# Altium PCB PCB181216ver1.PcbDoc
Units mm, origin at the board's own origin, x right, y up, seen from the top; angles counter-clockwise.
Board outline 92.5 x 85 mm, 2 copper layers (Top Layer, Bottom Layer), stack 1.671 mm thick; 35 components, 33 nets, 131 pads, 40 vias.
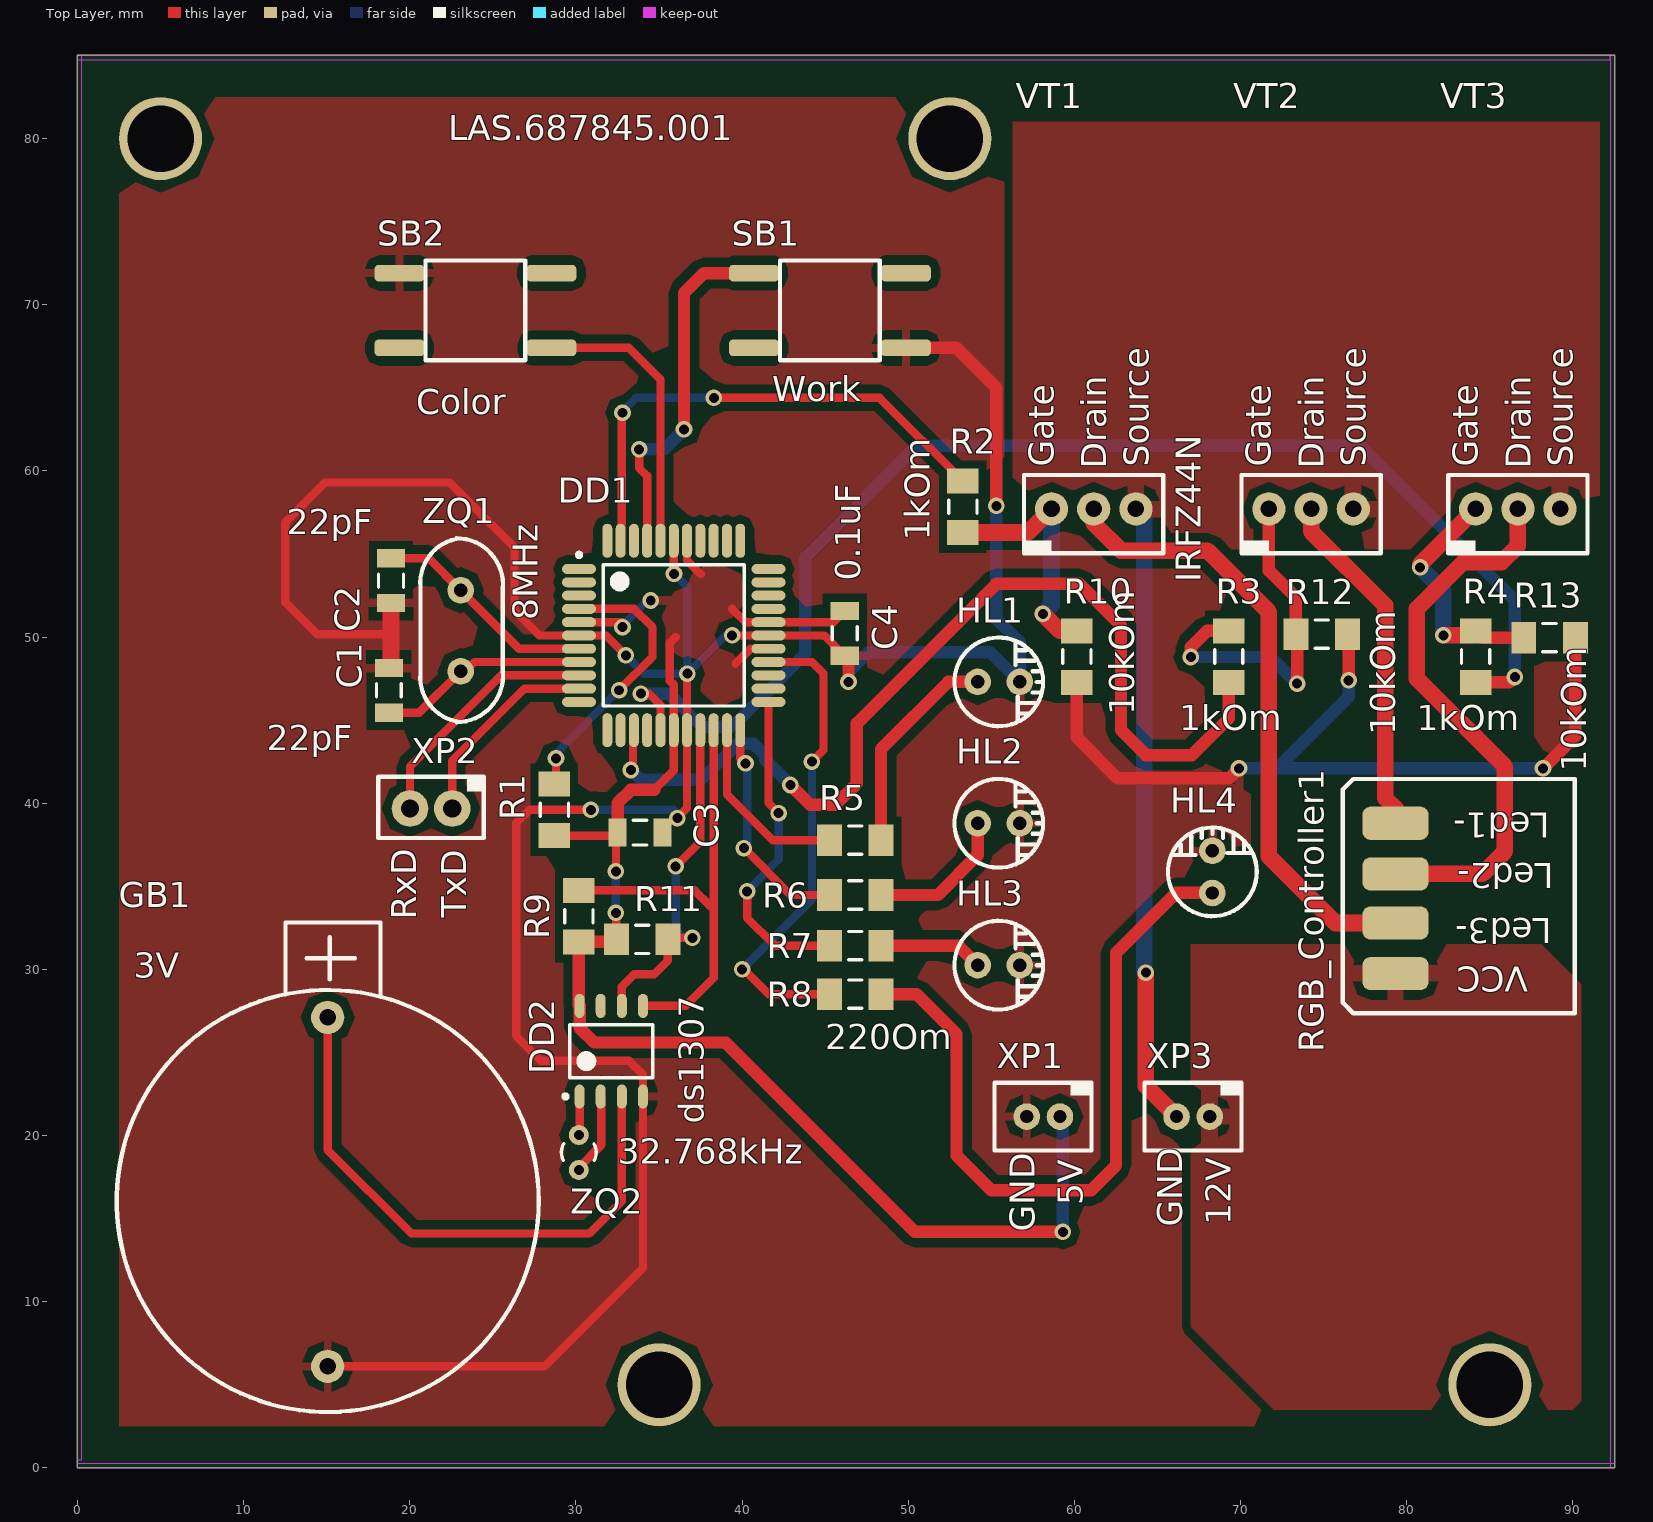
[diagram p0: Top Layer view]
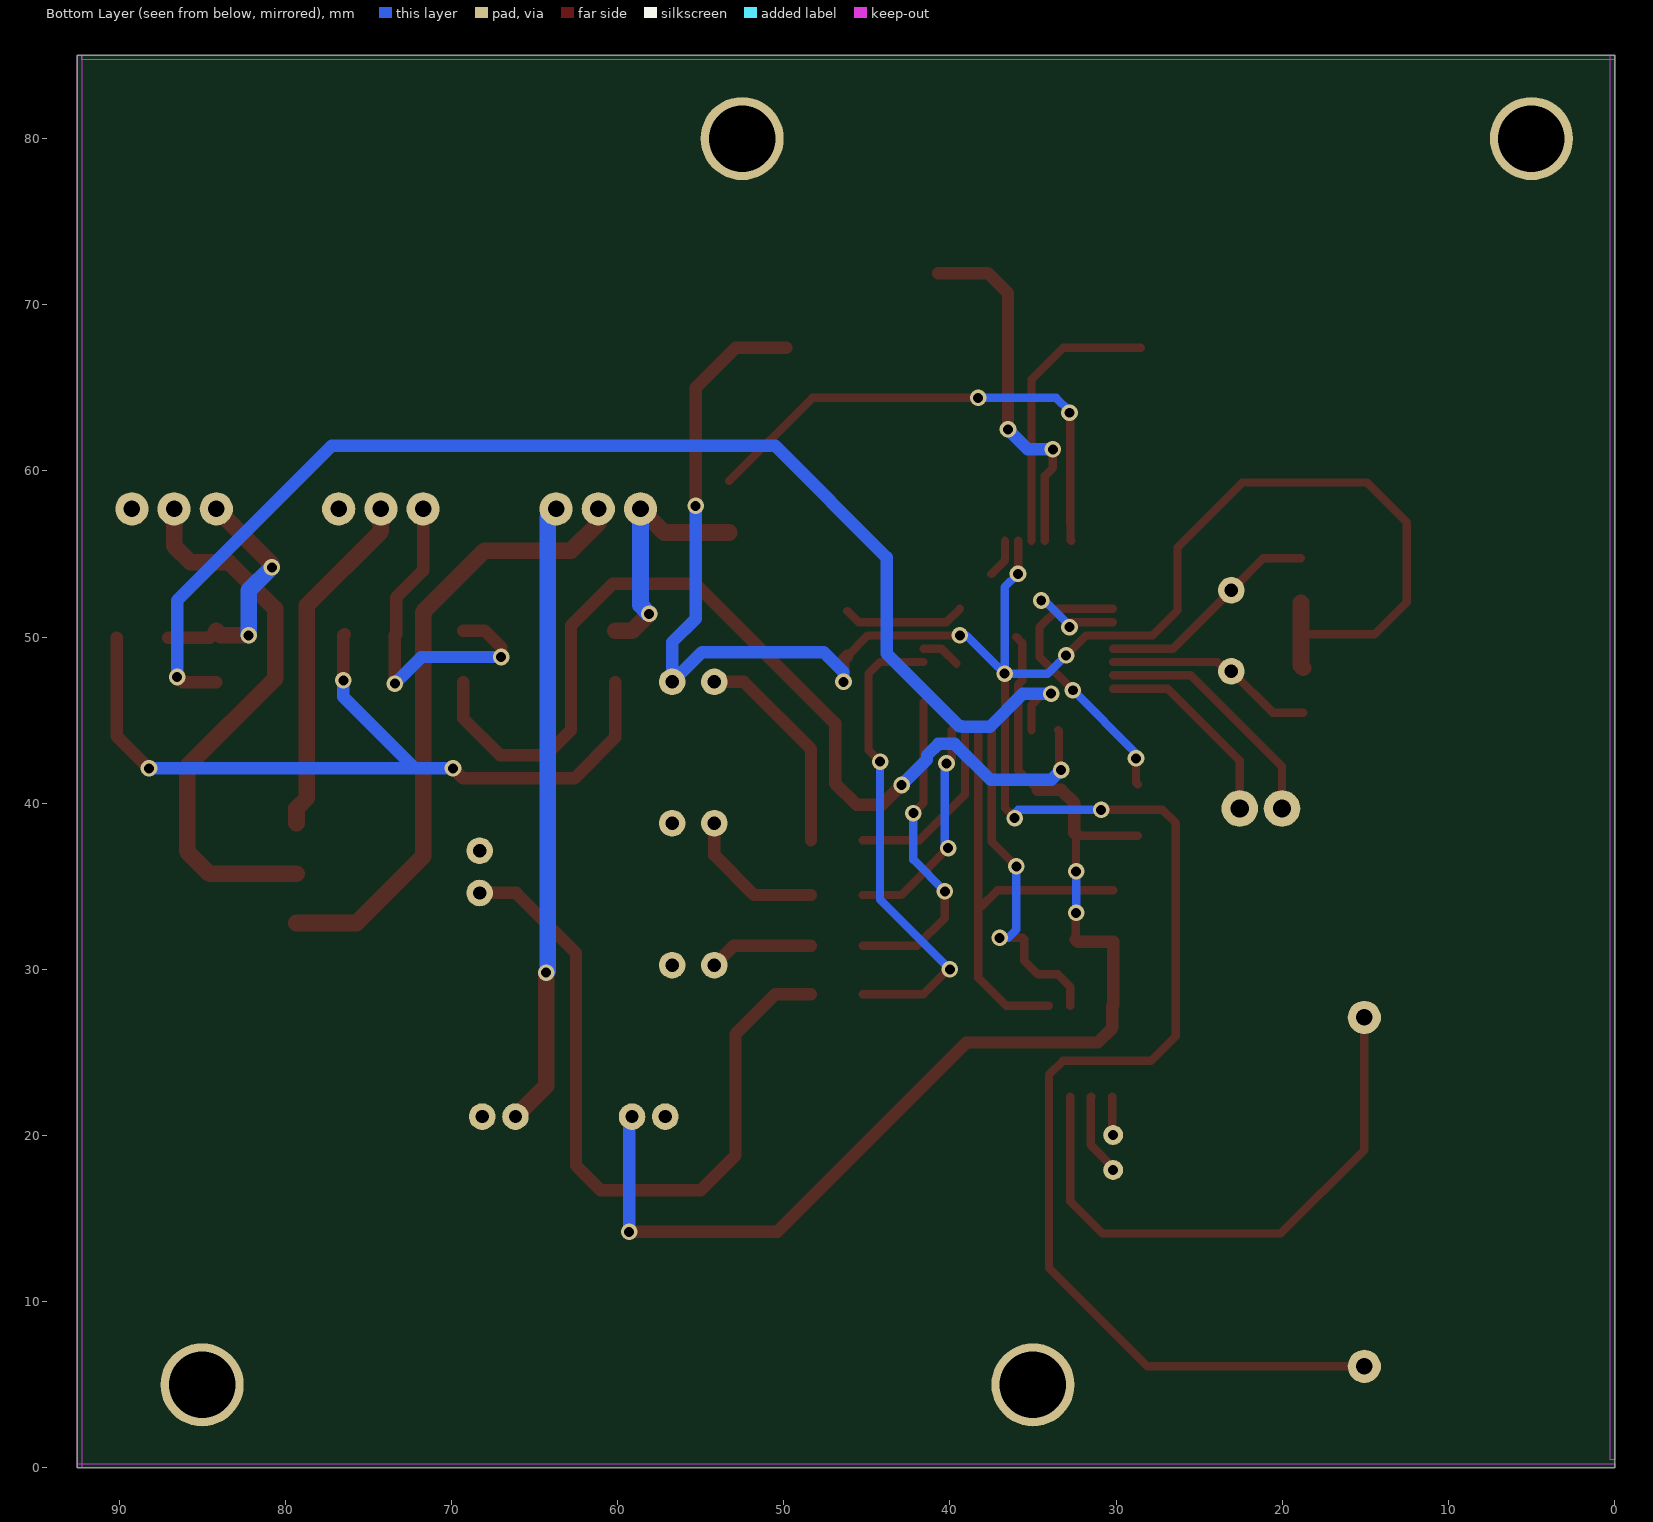
[diagram p1: Bottom Layer view, seen from below]
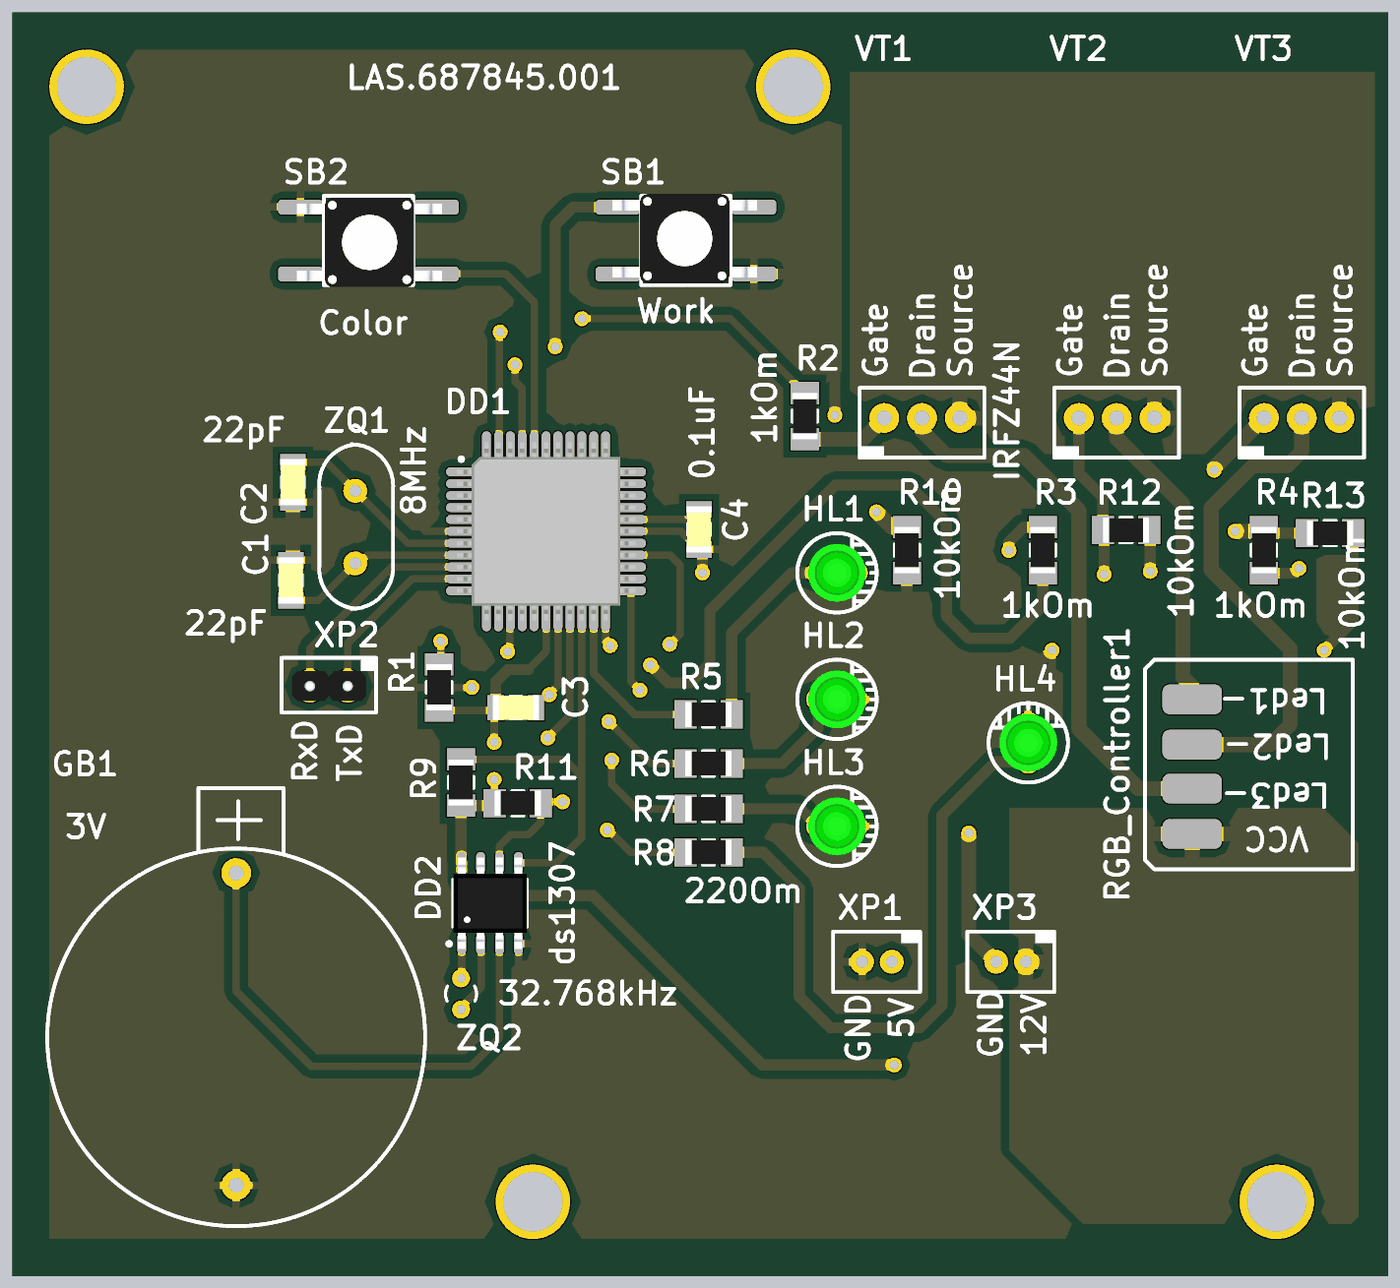
[diagram p2: 3D render of the assembled board from above, using the file's embedded part models]

## Layer stack, top to bottom
Top Solder: solder mask 0.0102, Solder Resist, Dk 3.5
Top Layer: signal copper 0.0356
Dielectric 1: dielectric 1.6, FR-4, Dk 4.8
Bottom Layer: signal copper 0.0356
Bottom Solder: solder mask 0.0102, Solder Resist, Dk 3.5

## Board outline
0,0 0,85 92.5,85 92.5,0

## Design rules (kind name [scope] priority, off if disabled: settings)
Clearance [All] p1: gap=0.5 except(0.2: Arc-SMDPad Track-SMDPad SMDPad-SMDPad; 0.254: Arc-Text Track-Text SMDPad-Text THPad-Text Via-Text Fill-Text Poly-Text Region-Text Text-Text; 0.3: Arc-Via Arc-Fill Track-Track Track-Via Track-Fill SMDPad-THPad SMDPad-Via SMDPad-Fill THPad-THPad THPad-Via THPad-Fill Via-Via Via-Fill Fill-Fill)
PlaneClearance DIG [InNetClass('digital')] p1: clearance=0.3
PlaneClearance OTT [InNetClass('other')] p2: clearance=0.5
PlaneClearance po12V [InNetClass('Power12V')] p3: clearance=1
PlaneClearance po5v [InNetClass('Power5V')] p4: clearance=0.5
PlaneConnect [InNetClass('digital')] p1: planeconnectstyle=Relief reliefexpansion=0.5 reliefentries=4 reliefconductorwidth=0.5 reliefairgap=0.5
PlaneConnect OT [InNetClass('other')] p2: planeconnectstyle=Relief reliefexpansion=0.5 reliefentries=4 reliefconductorwidth=0.5 reliefairgap=0.5
PlaneConnect 12Vol [InNetClass('Power12V')] p3: planeconnectstyle=Relief reliefexpansion=1 reliefentries=4 reliefconductorwidth=1 reliefairgap=0.75
PlaneConnect 5vol [All] p4: planeconnectstyle=Relief reliefexpansion=0.5 reliefentries=4 reliefconductorwidth=0.75 reliefairgap=0.5
PolygonConnect DDIGITALS [InNetClass('digital')] p1: connectstyle=Relief reliefconductorwidth=0.5 reliefentries=4 polygonreliefangle="90 Angle" airgapwidth=0.3
PolygonConnect OTTERS [InNetClass('other')] p2: connectstyle=Relief reliefconductorwidth=0.5 reliefentries=4 polygonreliefangle="90 Angle" airgapwidth=0.5
PolygonConnect 12Voltage [InNetClass('Power12V')] p3: connectstyle=Relief reliefconductorwidth=1 reliefentries=4 polygonreliefangle="90 Angle" airgapwidth=0.5
PolygonConnect 5voltage [InNetClass('Power5V')] p4: connectstyle=Relief reliefconductorwidth=0.5 reliefentries=4 polygonreliefangle="90 Angle" airgapwidth=0.5
RoutingVias [All] p1: holewidth=0.6 width=1 viastyle="Through Hole" minholewidth=0.6 minwidth=1 maxholewidth=0.6 maxwidth=1
SolderMaskExpansion [All] p1: expansion=0.102
Width [InNetClass('Power5V')] p1: maxlimit=1 minlimit=0.5 preferedwidth=0.5
Width 12V [InNetClass('Power12V')] p2: maxlimit=2 minlimit=1 preferedwidth=1.5
Width OTHERS [InNetClass('other')] p3: maxlimit=1 minlimit=0.5 preferedwidth=0.6
Width DIGITAL [InNetClass('digital')] p4: maxlimit=0.75 minlimit=0.3 preferedwidth=0.5
28 further rules are at their usual default settings.

## Classes and differential pairs
net class other: NetC1_2 NetC2_2 NetHL1_1 NetHL2_1 NetHL3_1 NetHL4_1 NetR2_2 NetR3_2 NetR4_2
net class digital: LED1 LED2 LED3 LED4 NetDD1_4 NetDD2_1 NetDD2_2 NetDD2_3 RGB_B RGB_G RGB_R RXD SCL SDA TXD
net class Power12V: 12V GND_12V NetRGB_Controller1_1 NetRGB_Controller1_2 NetRGB_Controller1_3
net class Power5V: GND VCC
component class circuit: C1 C2 C3 C4 DD1 DD2 GB1 HL1 HL2 HL3 HL4 R1 R2 R3 R4 R5 R6 R7 R8 R10 R12 R13 RGB_Controller1 SB1 SB2 VT1 VT2 VT3 XP1 XP2 XP3 ZQ1 ZQ2

## Components (designator, comment, footprint, x,y, rotation, side; value= is the part's Value field where it differs from the comment)
C1 "Capasitor" CAPC3216L 18.74,46.795 r270 top
C2 "Capasitor" CAPC3216L 18.867,53.399 r90 top
C3 "Capasitor" CAPC3216L 33.853,38.233 r180 top
C4 "Capasitor" CAPC3216L 46.172,50.224 r90 top
DD1 "ATMega 16" 44A_M 35.885,50.097 r0 top
DD2 "ds1307" SOIC127P600X135-8N 32.123,25.078 r90 top
GB1 "Battery" battery 15.057,27.11 r90 top
HL1 "LED" GNLR 54.173,47.303 r0 top
HL2 "LED" GNLR 54.173,38.794 r0 top
HL3 "LED" GNLR 54.173,30.252 r0 top
HL4 "LED" GNLR 68.3,34.6 r90 top
R1 "Resistor" RESC3216M 28.7,39.6 r270 top
R2 "Resistor" RESC3216M 53.284,57.844 r270 top
R3 "Resistor" RESC3216M 69.286,48.827 r90 top
R4 "Resistor" RESC3216M 84.145,48.827 r90 top
R5 "Resistor" RESC3216M 46.807,37.778 r0 top
R6 "Resistor" RESC3216M 46.807,34.476 r0 top
R7 "Resistor" RESC3216M 46.807,31.428 r0 top
R8 "Resistor" RESC3216M 46.807,28.507 r0 top
R9 "Resistor" RESC3216M 30.17,33.206 r270 top
R10 "Resistor" RESC3216M 60.142,48.827 r90 top
R11 "Resistor" RESC3216M 33.98,31.809 r180 top
R12 "Resistor" RESC3216M 74.874,50.177 r180 top
R13 "Resistor" RESC3216M 88.59,49.97 r180 top
RGB_Controller1 "RGB_Lent" RGB 79.319,38.794 r180 top
SB1 "button" "1102WD / 6x6x9,5 smd (T218)  технические характеристики скачать документацию (datasheet) по IT-1102WD / 6x6x9,5 smd" 45.283,69.655 r0 top
SB2 "button" "1102WD / 6x6x9,5 smd (T218)  технические характеристики скачать документацию (datasheet) по IT-1102WD / 6x6x9,5 smd" 23.947,69.655 r180 top
VT1 "IRZF44N" TO-220 58.618,57.717 r0 top
VT2 "IRZF44N" TO-220 71.699,57.717 r0 top
VT3 "IRZF44N" TO-220 84.145,57.717 r0 top
XP1 "Power Connector" HB-2.0 59.126,21.141 r180 top
XP2 "USART_connector" pls-02 22.55,39.683 r180 top
XP3 "Power 12V" HB-2.0 68.143,21.141 r180 top
ZQ1 "Rezanator8M" HC-49US 23.058,47.938 r90 top
ZQ2 "Rezanator" BCY-W2/D2.1 30.17,18.982 r180 top

## Footprints (in the part's own frame and the unit in brackets; to place one, negate y for a bottom-side part, rotate by r counter-clockwise, add the part's x,y. Pads: shape width x height; smd on the part's side, far side on the other; paste and mask are expansions set on the pad)
44A_M [mm] "Thin QFP, 44-Leads, Body 10x10mm, Pitch 0.8mm, IPC Low Density"
  oval 2.05x0.6 smd: 1(-5.7,4) 2(-5.7,3.2) 3(-5.7,2.4) 4(-5.7,1.6) 5(-5.7,0.8) 6(-5.7,0) 7(-5.7,-0.8) 8(-5.7,-1.6) 9(-5.7,-2.4) 10(-5.7,-3.2) 11(-5.7,-4) 23(5.7,-4) 24(5.7,-3.2) 25(5.7,-2.4) 26(5.7,-1.6) 27(5.7,-0.8) 28(5.7,0) 29(5.7,0.8) 30(5.7,1.6) 31(5.7,2.4) 32(5.7,3.2) 33(5.7,4)
  oval 0.6x2.05 smd: 12(-4,-5.7) 13(-3.2,-5.7) 14(-2.4,-5.7) 15(-1.6,-5.7) 16(-0.8,-5.7) 17(0,-5.7) 18(0.8,-5.7) 19(1.6,-5.7) 20(2.4,-5.7) 21(3.2,-5.7) 22(4,-5.7) 34(4,5.7) 35(3.2,5.7) 36(2.4,5.7) 37(1.6,5.7) 38(0.8,5.7) 39(0,5.7) 40(-0.8,5.7) 41(-1.6,5.7) 42(-2.4,5.7) 43(-3.2,5.7) 44(-4,5.7)
  silkscreen extent -5.82,-4.25 4.25,4.97, body extent -6,-6 6,6, height 1.2
"1102WD / 6x6x9,5 smd (T218)  технические характеристики скачать документацию (datasheet) по IT-1102WD / 6x6x9,5 smd" [mm]
  rrect50% 3x1 smd: 1(-4.572,2.25) 2(4.572,2.25) 3(-4.572,-2.25) 4(4.572,-2.25)
  silkscreen extent -3,-3 3,3, body extent -4.95,-2.87 4.8,3.13, height 9.7
battery [mm]
  round 2 hole 1: 1(0,0) 2(-21,0)
  silkscreen extent -23.75,-12.7 5.71,12.7, body extent -22,-11.5 3.5,11.5, height 8.11
BCY-W2/D2.1 [mm] "Crystal, Thru-Hole; 2 Leads; Body 2.1 x 6.2 mm (Dia.xH)"
  round 1.2 hole 0.6: 1(0,1.05) 2(0,-1.05)
  silkscreen extent -1.05,-0.53 1.05,0.48, body extent -8.03,-1.17 0.19,1.18, height 2.12
CAPC3216L [mm] "Chip Capacitor, Body 3.2x1.6mm, IPC High Density"
  rect 1.1x1.7 smd: 1(-1.35,0) 2(1.35,0)
  silkscreen extent -0.4,-0.75 0.4,0.75, body extent -1.55,-0.85 1.55,0.85, height 0.6
GNLR [mm]
  round 1.6 hole 0.8: 1(0,0) 2(2.54,0)
  silkscreen extent -1.4,-2.67 3.94,2.67, body extent -0.68,-1.95 3.22,1.95, height 8
HB-2.0 [mm]
  round 1.6 hole 0.8: 1(0,0) 2(2,0)
  silkscreen extent -1.91,-2.03 3.94,2.03, body extent -2.03,-2 3.97,2, height 10.39
HC-49US [mm]
  round 1.6 hole 0.8: 1(0,0) 2(4.88,0)
  silkscreen extent -3.06,-2.55 8.01,2.42, body extent -3.05,-2.5 7.95,2.5, height 14
pls-02 [mm]
  round 2.2 hole 1.1: 1(0,0) 2(2.54,0)
  silkscreen extent -1.91,-1.91 4.44,1.78, body extent -1.25,-1 3.75,1, height 9.5
RESC3216M [mm] "Chip Resistor, Body 3.2x1.6mm, IPC Low Density"
  rect 1.5x1.9 smd: 1(-1.55,0) 2(1.55,0)
  silkscreen extent -0.4,-0.85 0.4,0.85, body extent -1.55,-0.85 1.55,0.85, height 0.6
RGB [mm]
  rrect50% 4x2 smd: 1(0,0) 2(0,3.048) 3(0,6) 4(0,9.048)
  silkscreen extent -10.8,-2.67 3.18,11.43
SOIC127P600X135-8N [mm] "SOIC, 8-Leads, Body 4,88x3,93mm, Pitch 1,27mm, IPC Medium Density"
  oval 1.45x0.6 smd: 1(-2.725,1.905) 2(-2.725,0.635) 3(-2.725,-0.635) 4(-2.725,-1.905) 5(2.725,-1.905) 6(2.725,-0.635) 7(2.725,0.635) 8(2.725,1.905)
  silkscreen extent -2.85,-2.5 1.6,2.88, body extent -3.06,-2.48 3.06,2.47, height 2.05
TO-220 [mm]
  round 2 hole 1: 1(0,0) 2(2.54,0) 3(5.08,0)
  silkscreen extent -1.65,-2.67 6.73,2.03, body extent -2.41,-0.38 7.49,23.35, height 5.5

## Free pads (board coordinates)
  round 5 hole 4: 0(5,80) 2(52.5,80) 3(35,5) 4(85,5)

## Via types
v1: diameter 1, hole 0.6, Top Layer to Bottom Layer, 40 vias

## Nets (pads, with @x,y where several pads share a name; then routed paths per layer and width w, separated by ;. In a path a pad name is that pad's centre, name@x,y a point inside that pad or via, vN(x,y) a via of type N, cw(c..) or ccw(c..) an arc to the next point about the centre after c; other vN are vias at no path point)
12V: RGB_Controller1.4 XP3.1
GND: C1.1 C2.1 C3.1 C4.1 DD1.6 DD1.18 DD1.28 DD1.39 DD2.4 GB1.2 HL1.2 HL2.2 HL3.2 HL4.2 R10.1 R12.1 R13.1 SB1.4 SB2.4 XP1.2 | length 230.7
  Top Layer w0.5: GB1.2 28.11,6.11 34.028,12.028 DD2.4 34.028,23.672 33.2,24.5 27.9,24.5 26.4,26 26.4,38.8 27.2,39.6 v1(30.9,39.6) ; 18.867,50.16 14.44,50.16 12.5,52.1 12.5,56.9 14.9,59.3 22.4,59.3 26.3,55.4 26.3,51.6 27.803,50.097 DD1.6 31.803,50.097 v1(33,48.9) ; DD1.39 35.885,53.815 v1(35.9,53.8) ; v1@36.235,39.265 36.685,39.715 DD1.18 36.685,47.785 v1(36.7,47.8) ; v1(39.4,50.1) 39.403,50.097 DD1.28 44.949,50.097 C4.1
  Top Layer w0.75: C4.1 46.4,48.646 v1(46.4,47.3) ; SB1.4 52.895,67.405 55.3,65 v1(55.3,57.9) ; R10.1 60.142,43.958 62.6,41.5 69.3,41.5 v1(69.9,42.1) ; R12.1 76.5,50.101 v1(76.5,47.4) ; v1(88.2,42.1) 90.14,44.04 R13.1
  Top Layer w1: C1.1 18.867,48.272 18.867,50.16 C2.1
  Bottom Layer w0.5: v1(30.9,39.6) 35.9,39.6 36.1,39.4 v1(36.1,39.1) ; v1(33,48.9) 34.1,47.8 v1(36.7,47.8) ; v1(35.9,53.8) 36.7,53 v1(36.7,47.8) ; v1(39.4,50.1) 39,50.1 v1(36.7,47.8)
  Bottom Layer w0.75: v1(46.4,47.3) 46.4,47.9 47.6,49.1 54.916,49.1 HL1.2 56.713,49.687 55.3,51.1 v1(55.3,57.9) ; v1(69.9,42.1) 72.2,42.1 ; v1(76.5,47.4) 76.5,46.4 72.2,42.1 ; v1(88.2,42.1) 72.2,42.1
GND_12V: VT1.3 VT2.3 VT3.3 XP3.2 | length 37.6
  Top Layer w1: v1(64.3,29.8) 64.3,22.984 XP3.2
  Bottom Layer w1: VT1.3 64.2,57.215 64.2,29.9 v1(64.3,29.8)
LED1: DD1.21 R5.1 | length 11.2
  Top Layer w0.5: DD1.21 39.085,40.515 41.822,37.778 R5.1
LED2: DD1.22 R6.1 | length 14.1
  Top Layer w0.5: DD1.22 39.885,42.715 v1(40.2,42.4) ; v1(40.1,37.3) 42.924,34.476 R6.1
  Bottom Layer w0.5: v1(40.1,37.3) 40.3,37.3 40.3,42.1 40,42.4 v1(40.2,42.4)
LED3: DD1.23 R7.1 | length 19.7
  Top Layer w0.5: v1(40.3,34.7) 40.3,33.1 41.972,31.428 R7.1 ; DD1.23 41.585,40.015 v1(42.2,39.4)
  Bottom Layer w0.5: v1(40.3,34.7) 42.2,36.6 v1(42.2,39.4)
LED4: DD1.26 R8.1 | length 29.5
  Top Layer w0.5: v1(40,30) 40,30.1 41.593,28.507 R8.1 ; DD1.26 44.203,48.497 44.9,47.8 44.9,43.2 v1(44.2,42.5)
  Bottom Layer w0.5: v1(40,30) 44.2,34.2 v1(44.2,42.5)
NetC1_2: C1.2 DD1.8 ZQ1.1 | length 12.7
  Top Layer w0.5: C1.2 20.565,45.445 ZQ1.1 23.338,47.938 23.897,48.497 DD1.8
NetC2_2: C2.2 DD1.7 ZQ1.2 | length 13.6
  Top Layer w0.5: C2.2 21.127,54.749 ZQ1.2 26.579,49.297 DD1.7
NetDD1_4: DD1.4 R1.1 | length 16.8
  Top Layer w0.5: R1.1 28.8,41.25 v1(28.8,42.7) ; DD1.4 33.503,51.697 34.6,50.6 34.6,48.8 v1(32.6,46.8)
  Bottom Layer w0.5: v1(28.8,42.7) 28.8,43 v1(32.6,46.8)
NetDD2_1: DD2.1 ZQ2.2 | length 2.3
  Top Layer w0.5: ZQ2.2 30.218,20.08 DD2.1
NetDD2_2: DD2.2 ZQ2.1 | length 5
  Top Layer w0.5: ZQ2.1 30.17,18.091 31.52,19.441 31.52,22.321 DD2.2
NetDD2_3: DD2.3 GB1.1 | length 34.9
  Top Layer w0.5: GB1.1 15.057,19.143 20.1,14.1 30.8,14.1 32.758,16.058 DD2.3
NetHL1_1: HL1.1 R5.2 | length 13
  Top Layer w0.75: R5.2 48.357,43.257 52.403,47.303 HL1.1
NetHL2_1: HL2.1 R6.2 | length 8.7
  Top Layer w0.75: R6.2 51.776,34.476 54.173,36.873 HL2.1
NetHL3_1: HL3.1 R7.2 | length 6.3
  Top Layer w0.75: R7.2 52.997,31.428 HL3.1
NetHL4_1: HL4.1 R8.2 | length 44
  Top Layer w0.75: R8.2 50.493,28.507 52.9,26.1 52.9,18.8 55,16.7 61,16.7 62.5,18.2 62.5,31 66.1,34.6 HL4.1
NetR2_2: R2.2 R10.2 VT1.1 | length 14.9
  Top Layer w1: R2.2 57.195,56.294 VT1.1 ; v1(58.1,51.4) 59.123,50.377 R10.2
  Bottom Layer w1: v1(58.1,51.4) 58.618,51.918 VT1.1
NetR3_2: R3.2 R12.2 VT2.1 | length 21.6
  Top Layer w0.75: v1(67,48.8) 67,49.4 67.977,50.377 R3.2 ; VT2.1 71.699,54.001 73.324,52.376 R12.2 73.4,50.101 v1(73.4,47.2)
  Bottom Layer w0.75: v1(67,48.8) 71.8,48.8 v1(73.4,47.2)
NetR4_2: R4.2 R13.2 VT3.1 | length 14.7
  Top Layer w0.75: R4.2 84.552,49.97 R13.2
  Top Layer w1: v1(80.8,54.2) 80.8,54.372 VT3.1 ; v1(82.2,50.1) 83.868,50.1 R4.2
  Bottom Layer w1: v1(80.8,54.2) 82.2,52.8 v1(82.2,50.1)
NetRGB_Controller1_1: RGB_Controller1.1 VT2.2 | length 21
  Top Layer w1: VT2.2 74.239,56.361 78.7,51.9 78.7,40.3 79.319,39.681 RGB_Controller1.1
NetRGB_Controller1_2: RGB_Controller1.2 VT3.2 | length 33.8
  Top Layer w1: RGB_Controller1.2 84.546,35.746 85.9,37.1 85.9,42.2 80.6,47.5 80.6,51.7 83.4,54.5 85.7,54.5 86.685,55.485 VT3.2
NetRGB_Controller1_3: RGB_Controller1.3 VT1.2 | length 37.6
  Top Layer w1: VT1.2 61.158,56.842 62.8,55.2 68,55.2 71.7,51.5 71.7,36.8 75.706,32.794 RGB_Controller1.3
PB0: DD1.41 SB1.1 | length 21.8
  Top Layer w0.5: v1(33.8,61.3) 33.8,60.185 34.285,59.7 DD1.41
  Top Layer w0.75: v1(36.5,62.5) 36.5,70.7 37.705,71.905 SB1.1
  Bottom Layer w0.75: v1(33.8,61.3) 35.3,61.3 v1(36.5,62.5)
PB1: DD1.40 SB2.1 | length 17.1
  Top Layer w0.5: SB2.1 33.195,67.405 35.085,65.515 DD1.40
RGB_B: DD1.43 R2.1 | length 30.7
  Top Layer w0.5: DD1.43 32.735,55.847 32.735,56.833 32.75,56.848 32.75,63.45 v1(32.8,63.5) ; v1(38.3,64.4) 48.278,64.4 R2.1
  Bottom Layer w0.5: v1(32.8,63.5) 32.8,63.6 33.6,64.4 v1(38.3,64.4)
RGB_G: DD1.16 R4.1 | length 77.8
  Top Layer w0.5: v1(33.9,46.6) 34.4,46.6 35.085,45.915 DD1.16
  Top Layer w0.75: R4.1 86.177,47.277 v1(86.5,47.6)
  Bottom Layer w0.75: v1(33.9,46.6) 35.6,46.6 37.6,44.6 39.253,44.6 39.278,44.625 39.425,44.625 43.8,49 43.8,54.8 50.5,61.5 77.2,61.5 86.5,52.2 v1(86.5,47.6)
RGB_R: DD1.14 R3.1 | length 59.9
  Top Layer w0.5: v1(33.3,42) 33.435,42.135 33.435,44.347 DD1.14
  Top Layer w0.75: v1(42.9,41.1) 44.1,39.9 45.6,39.9 46.9,41.2 46.9,44.8 55.3,53.2 60.3,53.2 62.8,50.7 62.8,44.4 64.3,42.9 67.072,42.9 69.286,45.114 R3.1
  Bottom Layer w0.75: v1(33.3,42) 33.9,41.4 37.538,41.4 39.713,43.575 40.687,43.575 41.375,42.887 41.375,42.625 v1(42.9,41.1)
RXD: DD1.9 XP2.2 | length 15
  Top Layer w0.5: XP2.2 20.01,42.21 25.497,47.697 DD1.9
SCL: DD1.19 DD2.6 R11.1 | length 21.2
  Top Layer w0.5: DD2.6 32.758,28.958 33.5,29.7 34.7,29.7 35.53,30.53 R11.1 35.621,31.9 v1(37,31.9) ; v1(36,36.2) 37.485,37.685 DD1.19
  Bottom Layer w0.5: v1(36,36.2) 36,32.4 36.5,31.9 v1(37,31.9)
SDA: DD1.20 DD2.5 R9.1 | length 28.2
  Top Layer w0.5: R9.1 37.144,34.756 38.1,33.8 ; DD2.5 36.603,27.803 38.285,29.485 DD1.20
TXD: DD1.10 XP2.1 | length 12.3
  Top Layer w0.5: XP2.1 22.55,42.55 26.897,46.897 DD1.10
VCC: C3.2 C4.2 DD1.5 DD1.17 DD1.27 DD1.29 DD1.38 DD2.8 R1.2 R9.2 R11.2 XP1.1 | length 90.8
  Top Layer w0.5: R1.2 32.32,38.05 32.403,38.133 32.403,35.797 32.4,35.8 v1(32.4,35.9) ; DD1.5 32.8,50.897 v1(32.8,50.6) ; v1(32.4,33.4) 32.43,33.37 R11.2 ; 34.7,40.8 35.885,41.985 DD1.17 35.885,47.13 35.65,47.365 35.65,49.65 36,50 ; DD1.38 36.685,54.615 37.5,53.8 ; 39.4,51.7 40.203,50.897 DD1.29 45.495,50.897 C4.2 ; 39.6,48.4 40.497,49.297 DD1.27
  Top Layer w0.75: C3.2@32.403,38.133 C3.2 32.503,40.003 33.3,40.8 34.7,40.8 ; R11.2 32.277,31.656 R9.2 30.17,27.851 DD2.8 30.218,26.482 31.1,25.6 39,25.6 50.4,14.2 v1(59.3,14.2)
  Bottom Layer w0.5: v1(32.4,33.4) v1(32.4,35.9) ; v1(32.8,50.6) 32.8,50.7 34.3,52.2 v1(34.5,52.2)
  Bottom Layer w0.75: XP1.1 59.3,20.967 v1(59.3,14.2)
pads on no net: DD1.1 DD1.2 DD1.3 DD1.11 DD1.12 DD1.13 DD1.15 DD1.24 DD1.25 DD1.30 DD1.31 DD1.32 DD1.33 DD1.34 DD1.35 DD1.36 DD1.37 DD1.42 DD1.44 DD2.7 SB1.2 SB1.3 SB2.2 SB2.3

## Polygon pours and split planes (outlines as drawn)
12V on Top Layer "12V_L01_P002" (solid, remove dead copper, pour order 2): 67,31.5 67,17.5 67,8.5 72,3.5 90,3.5 90.5,4 90.5,26.6 90.5,29.1 88.1,31.5
GND_12V on Top Layer "GND_12V_L01_P004" (solid, remove dead copper, pour order 4): 56.3,81 56.3,62.7 56.3,59 60,55.3 90.4,55.3 90.8,55.3 91.4,55.9 91.6,56.1 91.6,81
VCC on Top Layer "VCC_L01_P006" (solid, remove dead copper, pour order 6): 29.9,56.1 29.9,44 41.9,44 41.9,56.1
GND on Top Layer "GND_L01_P008" (solid, remove dead copper, pour order 8): 54.5,50 54.5,16.7 55.3,15.9 57.6,15.9 59.5,15.9 61.7,18.1 63.5,19.9 63.5,33.7 63.5,34.7 64.4,35.6 64.7,35.9 69.1,35.9 71.8,35.9 72.9,37 75.7,39.8 75.7,50
GND on Top Layer "GND_L01_P010" (solid, remove dead copper, pour order 10): 2.5,82.5 2.5,2.5 90,2.5 90,82.5

## Keep-outs
Keep-Out Layer:
  rectangle: 0,0.5 0.25,85
  rectangle: 0,84.75 92.25,85
  rectangle: 92.25,0 92.5,85
  rectangle: 0,0 92.5,0.25

## Other copper
Top Layer:
  pour cut-out: 58.7,47.9 54.2,47.9 53.3,48.8 53.3,50.4 55.5,52.6 56.5,52.6 57.4,51.7 57.4,50.9 58.692,49.608 58.692,48.527
  pour cut-out: 90,42.981 89.919,42.9 89.6,42.9 89.6,43 90,43.4
  pour cut-out: 84.904,44.727 84.904,44.596 86.537,42.963 87.67,42.963 87.67,48.23 87.5,48.4 87.2,48.4 87.2,47.3 86.3,46.4 85,46.4
  pour cut-out: 76.217,46.435 74.165,46.435 74.1,46.5 74.1,48.4 75.3,48.4
  pour cut-out: 72.782,45.698 73.505,46.421 76.204,46.421 76.217,46.435 76.2,46.452 76.2,46.9 77.7,46.9 77.607,46.807 77.607,40.31 77.618,40.3 77,39.682 77,35.1 76.2,34.3 75.2,34.3 72.5,37 72.5,45.7
  pour cut-out: 86.8,41.4 91,41.4 91,30.7 89.2,30.7 88.1,31.8 88,31.7 81.6,31.7 81.4,31.9 81.4,34.6 81.9,35.1 84.8,35.1 86.7,37 86.7,41.5 86.8,41.5 87.2,41.9 90.6,41.9

## Silkscreen, mask and mechanical layers (free items; w line width, h text height)
Top Overlay:
  text "LAS.687845.001" at 22.3,79.9 h1.52
  text "Work" at 41.8,64.2 h1.52
  text "Color" at 20.4,63.4 h1.52
  text "22pF" at 12.6,56.2 h1.52
  text "1kOm" at 51.3,55.8 h1.52 r90
  text "0.1uF" at 47.1,53.4 h1.52 r90
  text "IRFZ44N" at 67.6,53.3 h1.52 r90
  text "8MHz" at 27.7,51 h1.52 r90
  text "10kOm" at 63.6,45.3 h1.52 r90
  text "1kOm" at 66.3,44.4 h1.52
  text "1kOm" at 80.6,44.4 h1.52
  text "10kOm" at 79.3,44.1 h1.52 r90
  text "22pF" at 11.4,43.2 h1.52
  text "10kOm" at 90.8,41.9 h1.52 r90
  text "TxD" at 23.4,33.1 h1.52 r90
  text "RxD" at 20.4,33 h1.52 r90
  text "3V" at 3.4,29.5 h1.52
  text "220Om" at 45,25.2 h1.52
  text "ds1307" at 37.7,20.7 h1.52 r90
  text "32.768kHz" at 32.5,18.3 h1.52
  text "5V" at 60.5,15.8 h1.52 r90
  text "12V" at 69.4,14.6 h1.52 r90
  text "GND" at 66.5,14.5 h1.52 r90
  text "GND" at 57.6,14.2 h1.52 r90
bord:
  lines w0.254: 0,0 0,85 92.5,85 92.5,0 2.5,0 0,0

## Text inside footprints (layer, text, board x,y; h text height)
RGB_Controller1: Top Overlay "Led1-" at 88.59,39.429 h1.52 r180; Top Overlay "Led2-" at 88.844,36.381 h1.52 r180; Top Overlay "Led3-" at 88.717,33.079 h1.52 r180; Top Overlay "VCC" at 87.32,30.158 h1.52 r180
VT1: Top Overlay "Source" at 64.46,60.257 h1.52 r90; Top Overlay "Drain" at 61.92,60.13 h1.52 r90; Top Overlay "Gate" at 58.745,60.257 h1.52 r90
VT2: Top Overlay "Source" at 77.541,60.257 h1.52 r90; Top Overlay "Drain" at 75.001,60.13 h1.52 r90; Top Overlay "Gate" at 71.826,60.257 h1.52 r90
VT3: Top Overlay "Source" at 89.987,60.257 h1.52 r90; Top Overlay "Drain" at 87.447,60.13 h1.52 r90; Top Overlay "Gate" at 84.272,60.257 h1.52 r90